# Altium PCB PCB1.PcbDoc
Units mm, origin at the board's own origin, x right, y up, seen from the top; angles counter-clockwise.
Board outline 110 x 30 mm, 2 copper layers (Top Layer, Bottom Layer), stack 1.571 mm thick; 9 components, 8 nets, 36 pads, 0 vias.
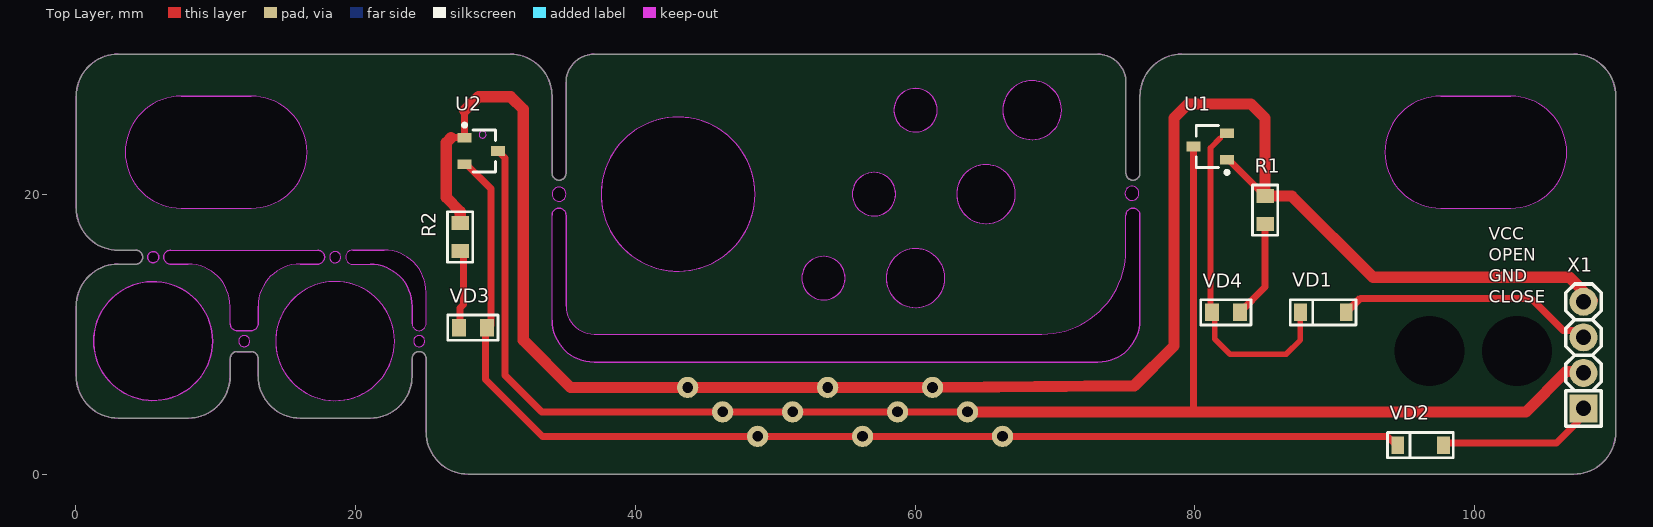
[diagram p0: Top Layer view]
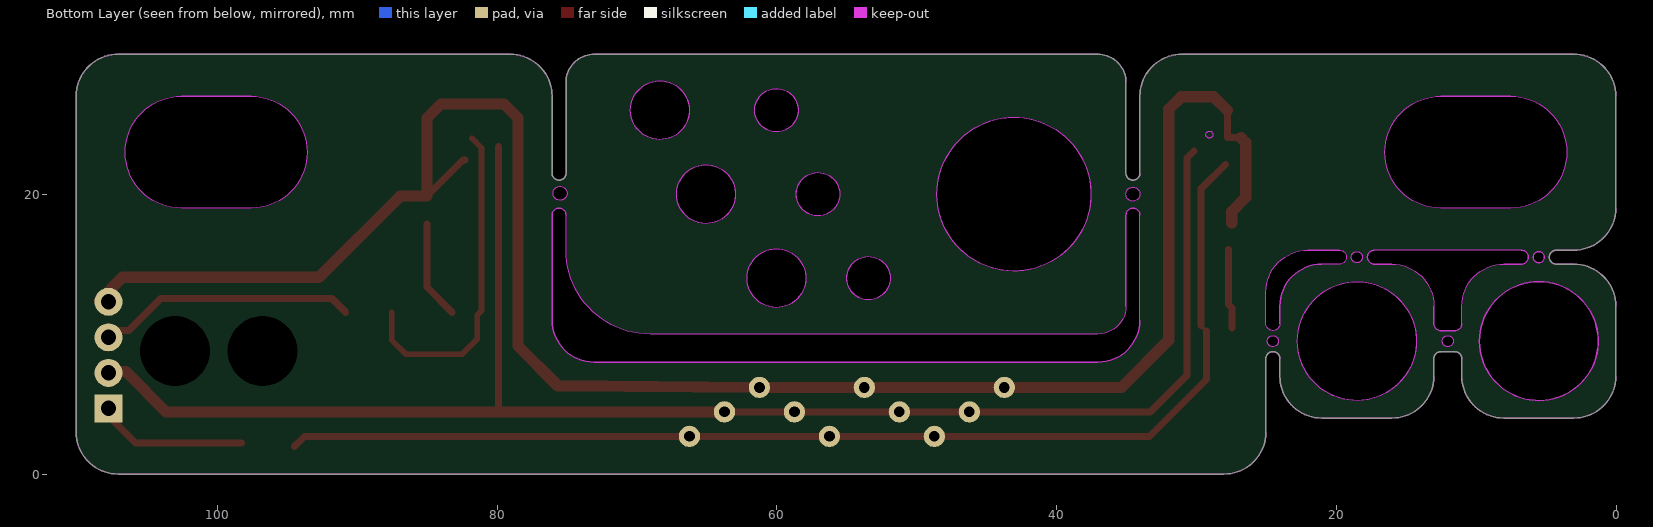
[diagram p1: Bottom Layer view, seen from below]
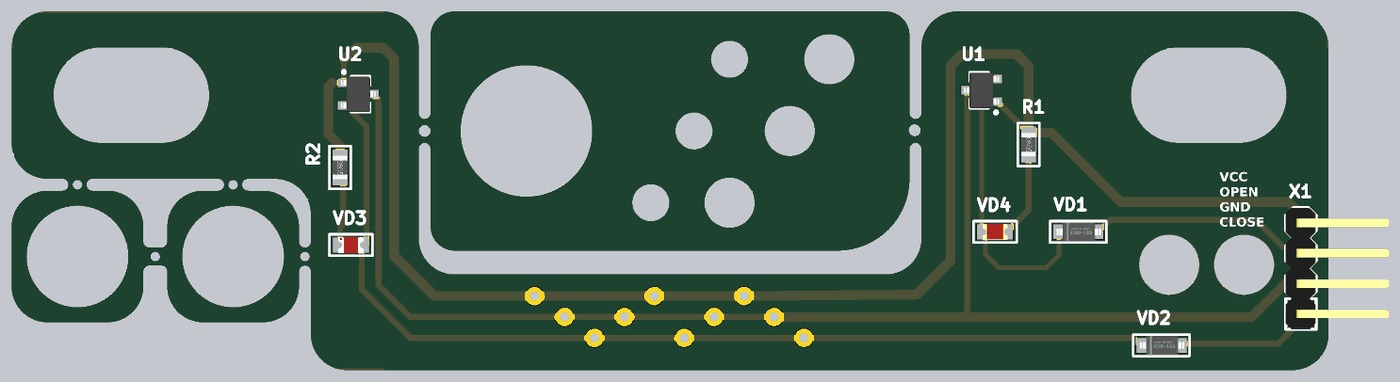
[diagram p2: 3D render of the assembled board from above, using the file's embedded part models]

## Layer stack, top to bottom
Top Solder: solder mask 0.0102, Solder Resist, Dk 3.5
Top Layer: signal copper 0.0356
Dielectric 1: dielectric 1.5, FR-4, Dk 4.8
Bottom Layer: signal copper 0.0356
Bottom Solder: solder mask 0.0102, Solder Resist, Dk 3.5

## Board outline
3.065,4.057 cw(c3.065,7.057) 0.065,7.057 0.065,12.057 cw(c3.065,12.057) 3.065,15.057 4.315,15.057 ccw(c4.315,15.557) 4.315,16.057 3.065,16.057 cw(c3.065,19.057) 0.065,19.057 0.065,27.057 cw(c3.065,27.057) 3.065,30.057 31.065,30.057 cw(c31.065,27.057) 34.065,27.057 34.065,21.557 ccw(c34.565,21.557) 35.065,21.557 35.065,28.057 cw(c37.065,28.057) 37.065,30.057 73.065,30.057 cw(c73.065,28.057) 75.065,28.057 75.065,21.557 ccw(c75.565,21.557) 76.065,21.557 76.065,27.057 cw(c79.065,27.057) 79.065,30.057 107.065,30.057 cw(c107.065,27.057) 110.065,27.057 110.065,3.057 cw(c107.065,3.057) 107.065,0.057 28.065,0.057 cw(c28.065,3.057) 25.065,3.057 25.065,8.307 ccw(c24.565,8.307) 24.065,8.307 24.065,7.057 cw(c21.065,7.057) 21.065,4.057 16.065,4.057 cw(c16.065,7.057) 13.065,7.057 13.065,8.307 ccw(c12.565,8.307) 12.565,8.807 11.565,8.807 ccw(c11.565,8.307) 11.065,8.307 11.065,7.057 cw(c8.065,7.057) 8.065,4.057
cut-out: 7.565,19.057 12.565,19.057 ccw(c12.565,23.057) 12.565,27.057 7.565,27.057 ccw(c7.565,23.057)
cut-out: 5.565,15.157 cw(c5.565,15.557) 5.165,15.557 cw(c5.565,15.557) 5.565,15.957 cw(c5.565,15.557) 5.965,15.557 cw(c5.565,15.557)
cut-out: 5.565,5.307 cw(c5.565,9.557) 1.315,9.557 cw(c5.565,9.557) 5.565,13.807 cw(c5.565,9.557) 9.815,9.557 cw(c5.565,9.557)
cut-out: 14.315,9.557 ccw(c18.565,9.557) 18.565,5.307 ccw(c18.565,9.557) 22.815,9.557 ccw(c18.565,9.557) 18.565,13.807 ccw(c18.565,9.557)
cut-out: 11.665,9.557 ccw(c12.065,9.557) 12.065,9.157 ccw(c12.065,9.557) 12.465,9.557 ccw(c12.065,9.557) 12.065,9.957 ccw(c12.065,9.557)
cut-out: 24.165,9.557 ccw(c24.565,9.557) 24.565,9.157 ccw(c24.565,9.557) 24.965,9.557 ccw(c24.565,9.557) 24.565,9.957 ccw(c24.565,9.557)
cut-out: 18.165,15.557 ccw(c18.565,15.557) 18.565,15.157 ccw(c18.565,15.557) 18.965,15.557 ccw(c18.565,15.557) 18.565,15.957 ccw(c18.565,15.557)
cut-out: 11.065,12.057 ccw(c8.065,12.057) 8.065,15.057 6.815,15.057 cw(c6.815,15.557) 6.815,16.057 17.315,16.057 cw(c17.315,15.557) 17.315,15.057 16.065,15.057 ccw(c16.065,12.057) 13.065,12.057 13.065,10.807 cw(c12.565,10.807) 12.565,10.307 11.565,10.307 cw(c11.565,10.807) 11.065,10.807
cut-out: 19.815,15.057 21.065,15.057 cw(c21.065,12.057) 24.065,12.057 24.065,10.807 ccw(c24.565,10.807) 25.065,10.807 25.065,13.057 ccw(c22.065,13.057) 22.065,16.057 19.815,16.057 ccw(c19.815,15.557)
cut-out: 34.065,20.057 ccw(c34.565,20.057) 34.565,19.557 ccw(c34.565,20.057) 35.065,20.057 ccw(c34.565,20.057) 34.565,20.557 ccw(c34.565,20.057)
cut-out: 74.997,20.117 ccw(c75.497,20.117) 75.497,19.617 ccw(c75.497,20.117) 75.997,20.117 ccw(c75.497,20.117) 75.497,20.617 ccw(c75.497,20.117)
cut-out: 37.565,20.057 ccw(c43.065,20.057) 43.065,14.557 ccw(c43.065,20.057) 48.565,20.057 ccw(c43.065,20.057) 43.065,25.557 ccw(c43.065,20.057)
cut-out: 58.486,26.057 ccw(c60.036,26.057) 60.036,24.507 ccw(c60.036,26.057) 61.586,26.057 ccw(c60.036,26.057) 60.036,27.607 ccw(c60.036,26.057)
cut-out: 55.515,20.057 ccw(c57.065,20.057) 57.065,18.507 ccw(c57.065,20.057) 58.615,20.057 ccw(c57.065,20.057) 57.065,21.607 ccw(c57.065,20.057)
cut-out: 51.908,14.057 ccw(c53.458,14.057) 53.458,12.507 ccw(c53.458,14.057) 55.008,14.057 ccw(c53.458,14.057) 53.458,15.607 ccw(c53.458,14.057)
cut-out: 62.965,20.057 ccw(c65.065,20.057) 65.065,17.957 ccw(c65.065,20.057) 67.165,20.057 ccw(c65.065,20.057) 65.065,22.157 ccw(c65.065,20.057)
cut-out: 97.565,19.057 102.565,19.057 ccw(c102.565,23.057) 102.565,27.057 97.565,27.057 ccw(c97.565,23.057)
cut-out: 66.264,26.057 ccw(c68.364,26.057) 68.364,23.957 ccw(c68.364,26.057) 70.464,26.057 ccw(c68.364,26.057) 68.364,28.157 ccw(c68.364,26.057)
cut-out: 57.936,14.057 ccw(c60.036,14.057) 60.036,11.957 ccw(c60.036,14.057) 62.136,14.057 ccw(c60.036,14.057) 60.036,16.157 ccw(c60.036,14.057)
cut-out: 35.065,12.057 ccw(c37.065,12.057) 37.065,10.057 69.065,10.057 ccw(c69.065,16.057) 75.065,16.057 75.065,18.557 cw(c75.565,18.557) 76.065,18.557 76.065,11.057 cw(c73.065,11.057) 73.065,8.057 37.065,8.057 cw(c37.065,11.057) 34.065,11.057 34.065,18.557 cw(c34.565,18.557) 35.065,18.557

## Design rules (kind name [scope] priority, off if disabled: settings)
BoardOutlineClearance [All] p1: gap=0.3 ignorepadtopadclearanceinfootprint=FALSE
Clearance Clearance_MultiLayerPad [OnLayer('Multi-Layer') and IsPad] p1: gap=0.25 ignorepadtopadclearanceinfootprint=FALSE except(0: Arc-Hole Track-Hole SMDPad-Hole THPad-Hole Via-Hole Fill-Hole Poly-Hole Region-Hole Text-Hole)
Clearance Clearance_Polygon [InPolygon] p2: gap=0.2 ignorepadtopadclearanceinfootprint=FALSE except(0: Arc-Hole Track-Hole SMDPad-Hole THPad-Hole Via-Hole Fill-Hole Poly-Hole Region-Hole Text-Hole)
Clearance [All] p3: gap=0.15 ignorepadtopadclearanceinfootprint=FALSE except(0: Arc-Hole Track-Hole SMDPad-Hole THPad-Hole Via-Hole Fill-Hole Poly-Hole Region-Hole Text-Hole)
HoleToHoleClearance [All] p1: gap=0.2 allowstackedmicrovias=TRUE
MinimumSolderMaskSliver [All] p1: minsoldermaskwidth=0.2
PlaneClearance [All] p1: clearance=0.5
PlaneConnect [All] p1: planeconnectstyle=Relief reliefexpansion=0.5 reliefentries=4 reliefconductorwidth=0.3 reliefairgap=0.2
PolygonConnect PolygonConnect_PadGND [InNet('GND') and IsPad] p1: connectstyle=Relief reliefconductorwidth=0.5 reliefentries=4 polygonreliefangle="90 Angle" airgapwidth=0.2
PolygonConnect PolygonConnect_Via [IsVia] p2: connectstyle=Direct reliefconductorwidth=0.254 reliefentries=4 polygonreliefangle="90 Angle" airgapwidth=0.254
PolygonConnect [All] p3: connectstyle=Relief reliefconductorwidth=0.3 reliefentries=4 polygonreliefangle="90 Angle" airgapwidth=0.2
RoutingVias [All] p1: holewidth=0.3 width=0.7 viastyle="Through Hole" minholewidth=0.3 minwidth=0.7 maxholewidth=0.3 maxwidth=0.7
SilkToSolderMaskClearance [IsPad] p1: minsilkscreentomaskgap=0.2 clearancetoexposedcopper=TRUE
SolderMaskExpansion [All] p1: expansion=0.075
UnRoutedNet [All] p1: checkbadconnections=TRUE
Width [All] p1: maxlimit=10 minlimit=0.2 preferedwidth=0.5
24 further rules are at their usual default settings.

## Components (designator, comment, footprint, x,y, rotation, side; value= is the part's Value field where it differs from the comment)
R1 "1k" CH0805R 85.008,18.919 r270 top
R2 "1k" CH0805R 27.5,17 r270 top
U1 "Hal" A1103ELHLT-T 81.085,23.465 r180 top
U2 "Hal" A1103ELHLT-T 29.015,23.14 r0 top
VD1 "*" SOD123 90.808,11.619 r180 top
VD2 "*" SOD123 97.758,2.119 r180 top
VD3 "*" CH0805LB 28.408,10.519 r0 top
VD4 "*" CH0805LR 82.208,11.619 r180 top
X1 "*" "CON: PLS-4(90)" 107.758,8.559 r90 top

## Footprints (in the part's own frame and the unit in brackets; to place one, negate y for a bottom-side part, rotate by r counter-clockwise, add the part's x,y. Pads: shape width x height; smd on the part's side, far side on the other; paste and mask are expansions set on the pad)
A1103ELHLT-T [mm] "Hall Sensor SOT23"
  rect 1x0.7 smd: 1(-1.2,0.95) 2(-1.2,-0.95) 3(1.2,0)
  silkscreen extent -1.33,-1.5 1,1.97, body extent -1.45,-1.5 1.45,1.5, height 1
CH0805LB [mm]
  rect 1x1.25 smd: 1(-1,0) 2(1,0)
  silkscreen extent -1.8,-0.9 1.8,0.9, body extent -1.05,-0.67 1.05,0.68, height 0.8
CH0805LR [mm]
  rect 1x1.25 smd: 1(-1,0) 2(1,0)
  silkscreen extent -1.8,-0.9 1.8,0.9, body extent -1.05,-0.67 1.05,0.68, height 0.9
CH0805R [mm]
  rect 1x1.25 smd: 1(-1,0) 2(1,0)
  silkscreen extent -1.8,-0.9 1.8,0.9, body extent -1,-0.6 1,0.6, height 0.44
"CON: PLS-4(90)" [mm] "PLS-40 4 pin header"
  rect 2x2 hole 1.1: 1(-3.81,0)
  round 2 hole 1.1: 2(-1.27,0) 3(1.27,0) 4(3.81,0)
  silkscreen extent -5.08,-1.27 5.08,1.27, body extent -5.08,-7.32 5.08,1.3, height 5.5
SOD123 [mm]
  rect 0.91x1.22 smd: 1(0,0) 2(3.275,0)
  round 0.5 on Mech1: 4(3,0.4)
  silkscreen extent -0.7,-0.9 4,0.9, body extent -0.25,-0.8 3.45,0.8, height 1.25

## Part data
R1 R2: library part Resistor
VD1 VD2: library part Diod
VD3 VD4: library part LED
X1: library part 4-Connector

## Free pads (board coordinates)
  round 2 hole 5: 2(96.758,8.869) 2(103.008,8.869)
  round 1.524 hole 0.762: 3(61.25,6.25) 4(58.75,4.5) 5(56.25,2.75) 6(53.75,6.25) 7(51.25,4.5) 8(48.75,2.75) 9(46.25,4.5) 10(43.75,6.25) 11(63.75,4.5) 12(66.25,2.75)

## Nets (pads, with @x,y where several pads share a name; then routed paths per layer and width w, separated by ;. In a path a pad name is that pad's centre, name@x,y a point inside that pad or via, vN(x,y) a via of type N, cw(c..) or ccw(c..) an arc to the next point about the centre after c; other vN are vias at no path point)
close: VD2.1 X1.1 | length 11.2
  Top Layer w0.5: 98.258,2.269 105.838,2.269 X1.1@108.408,4.839
GND: pad.4 pad.7 pad.9 pad.11 U1.3 U2.3 X1.2 | length 114.7
  Top Layer w0.5: U2.3 30.708,22.646 30.708,7.119 33.327,4.5 pad.9 pad.7 pad.4 ; pad.4@59.066,4.674 pad.4 ; pad.11 pad.4 ; 79.885,4.719 U1.3
  Top Layer w0.8: pad.11 103.639,4.5 106.518,7.379 X1.2@107.758,7.379
NetR1_2: R1.2 VD4.1 | length 7
  Top Layer w0.5: VD4.1 85.008,13.419 R1.2
NetR2_2: R2.2 VD3.1 | length 5.7
  Top Layer w0.5: VD3.1@27.5,10.5 27.5,11.927 27.75,12.177 R2.2@27.75,16.119
NetU1_2: U1.2 VD1.2 VD4.2 | length 23.7
  Top Layer w0.4: 81.808,24.058 81.108,23.358 81.108,11.719 VD4.2 81.408,11.419 81.408,9.719 82.508,8.619 86.508,8.619 87.533,9.644 VD1.2
NetU2_2: pad.5 pad.8 pad.12 U2.2 VD2.2 VD3.2 | length 83.6
  Top Layer w0.254: U2.2 U2.2@27.965,22.19 ; VD3.2@29.308,10.265 VD3.2@29.708,10.665
  Top Layer w0.5: U2.2@27.965,22.19 29.708,20.446 VD3.2@29.708,10.665 ; VD3.2@29.308,10.265 29.308,6.819 33.377,2.75 pad.8 pad.5 pad.12 93.75,2.75 94,2.5 94.002,2.5 VD2.2@94.483,2.019
open: VD1.1 X1.3 | length 19.1
  Top Layer w0.254: X1.3@108.008,10.319 X1.3@108.408,9.919
  Top Layer w0.5: VD1.1 91.808,12.619 104.008,12.619 106.308,10.319 X1.3@108.008,10.319
vcc: pad.3 pad.6 pad.10 R1.1 R2.1 U1.1 U2.1 X1.4 | length 139.6
  Top Layer w0.5: 26.84,24.09 U2.1 27.815,26.026 ; U1.1@82.285,22.5 82.427,22.5 R1.1
  Top Layer w0.8: 26.84,24.09 26.508,23.758 26.508,19.819 27.5,18.827 R2.1 ; 27.815,26.026 28.808,27.019 31.108,27.019 32.008,26.119 32.008,9.619 35.377,6.25 pad.10 pad.6 pad.3 75.658,6.369 78.508,9.219 78.508,25.508 79.5,26.5 84,26.5 85.008,25.492 R1.1 86.908,19.919 92.708,14.119 106.748,14.119 X1.4@108.408,12.459
pads on no net: VD1.4 VD2.4

## Keep-outs
Keep-Out Layer:
  circle w0.013: c18.565,9.557 r4.25
  circle w0.013: c5.565,9.557 r4.25
  circle w0.013: c43.065,20.057 r5.5
  circle w0.013: c68.364,26.057 r2.1
  circle w0.013: c60.036,14.057 r2.1
  circle w0.013: c65.065,20.057 r2.1
  circle w0.013: c29.098,24.313 r0.25
  circle w0.013: c53.458,14.057 r1.55
  circle w0.013: c57.065,20.057 r1.55
  circle w0.013: c60.036,26.057 r1.55
  circle w0.013: c75.497,20.117 r0.5
  circle w0.013: c34.565,20.057 r0.5
  circle w0.013: c12.065,9.557 r0.4
  circle w0.013: c24.565,9.557 r0.4
  circle w0.013: c18.565,15.557 r0.4
  circle w0.013: c5.565,15.557 r0.4
  lines w0.013: 0.065,7.057 ccw(c3.065,7.057) 3.065,4.057 8.065,4.057 ccw(c8.065,7.057) 11.065,7.057 11.065,8.307 cw(c11.565,8.307) 11.565,8.807 12.565,8.807 cw(c12.565,8.307) 13.065,8.307 13.065,7.057 ccw(c16.065,7.057) 16.065,4.057 21.065,4.057 ccw(c21.065,7.057) 24.065,7.057 24.065,8.307 cw(c24.565,8.307) 25.065,8.307 25.065,3.057 ccw(c28.065,3.057) 28.065,0.057 107.065,0.057 ccw(c107.065,3.057) 110.065,3.057 110.065,27.057 ccw(c107.065,27.057) 107.065,30.057 79.065,30.057 ccw(c79.065,27.057) 76.065,27.057 76.065,21.557 cw(c75.565,21.557) 75.065,21.557 75.065,28.057 ccw(c73.065,28.057) 73.065,30.057 37.065,30.057 ccw(c37.065,28.057) 35.065,28.057 35.065,21.557 cw(c34.565,21.557) 34.065,21.557 34.065,27.057 ccw(c31.065,27.057) 31.065,30.057 3.065,30.057 ccw(c3.065,27.057) 0.065,27.057 0.065,19.057 ccw(c3.065,19.057) 3.065,16.057 4.315,16.057 cw(c4.315,15.557) 4.315,15.057 3.065,15.057 ccw(c3.065,12.057) 0.065,12.057 0.065,7.057 ; 6.815,15.057 cw(c6.815,15.557) 6.815,16.057 17.315,16.057 cw(c17.315,15.557) 17.315,15.057 16.065,15.057 ccw(c16.065,12.057) 13.065,12.057 13.065,10.807 cw(c12.565,10.807) 12.565,10.307 11.565,10.307 cw(c11.565,10.807) 11.065,10.807 11.065,12.057 ccw(c8.065,12.057) 8.065,15.057 6.815,15.057 ; 7.565,19.057 cw(c7.565,23.057) 7.565,27.057 12.565,27.057 cw(c12.565,23.057) 12.565,19.057 7.565,19.057 ; 19.815,15.057 cw(c19.815,15.557) 19.815,16.057 22.065,16.057 cw(c22.065,13.057) 25.065,13.057 25.065,10.807 cw(c24.565,10.807) 24.065,10.807 24.065,12.057 ccw(c21.065,12.057) 21.065,15.057 19.815,15.057 ; 34.065,11.057 ccw(c37.065,11.057) 37.065,8.057 73.065,8.057 ccw(c73.065,11.057) 76.065,11.057 76.065,18.557 ccw(c75.565,18.557) 75.065,18.557 75.065,16.057 cw(c69.065,16.057) 69.065,10.057 37.065,10.057 cw(c37.065,12.057) 35.065,12.057 35.065,18.557 ccw(c34.565,18.557) 34.065,18.557 34.065,11.057 ; 97.565,19.057 cw(c97.565,23.057) 97.565,27.057 102.565,27.057 cw(c102.565,23.057) 102.565,19.057 97.565,19.057

## Other copper
Top Layer:
  pour cut-out: 35.065,12.057 ccw(c37.065,12.057) 37.065,10.057 69.065,10.057 ccw(c69.065,16.057) 75.065,16.057 75.065,18.557 cw(c75.565,18.557) 76.065,18.557 76.065,11.057 cw(c73.065,11.057) 73.065,8.057 37.065,8.057 cw(c37.065,11.057) 34.065,11.057 34.065,18.557 cw(c34.565,18.557) 35.065,18.557

## Silkscreen, mask and mechanical layers (free items; w line width, h text height)
Top Overlay:
  text "VCC / OPEN / GND / CLOSE" at 101,12 h1.5

## Dimensions
0.065,27.057 to 110.065,27.057 on Top Layer
31.065,30.057 to 28.065,0.057 on Top Layer